# EAGLE board SparkFun_Level_Translator_PCA9306-Panel (EAGLE 9.4.0), part 1 of 4
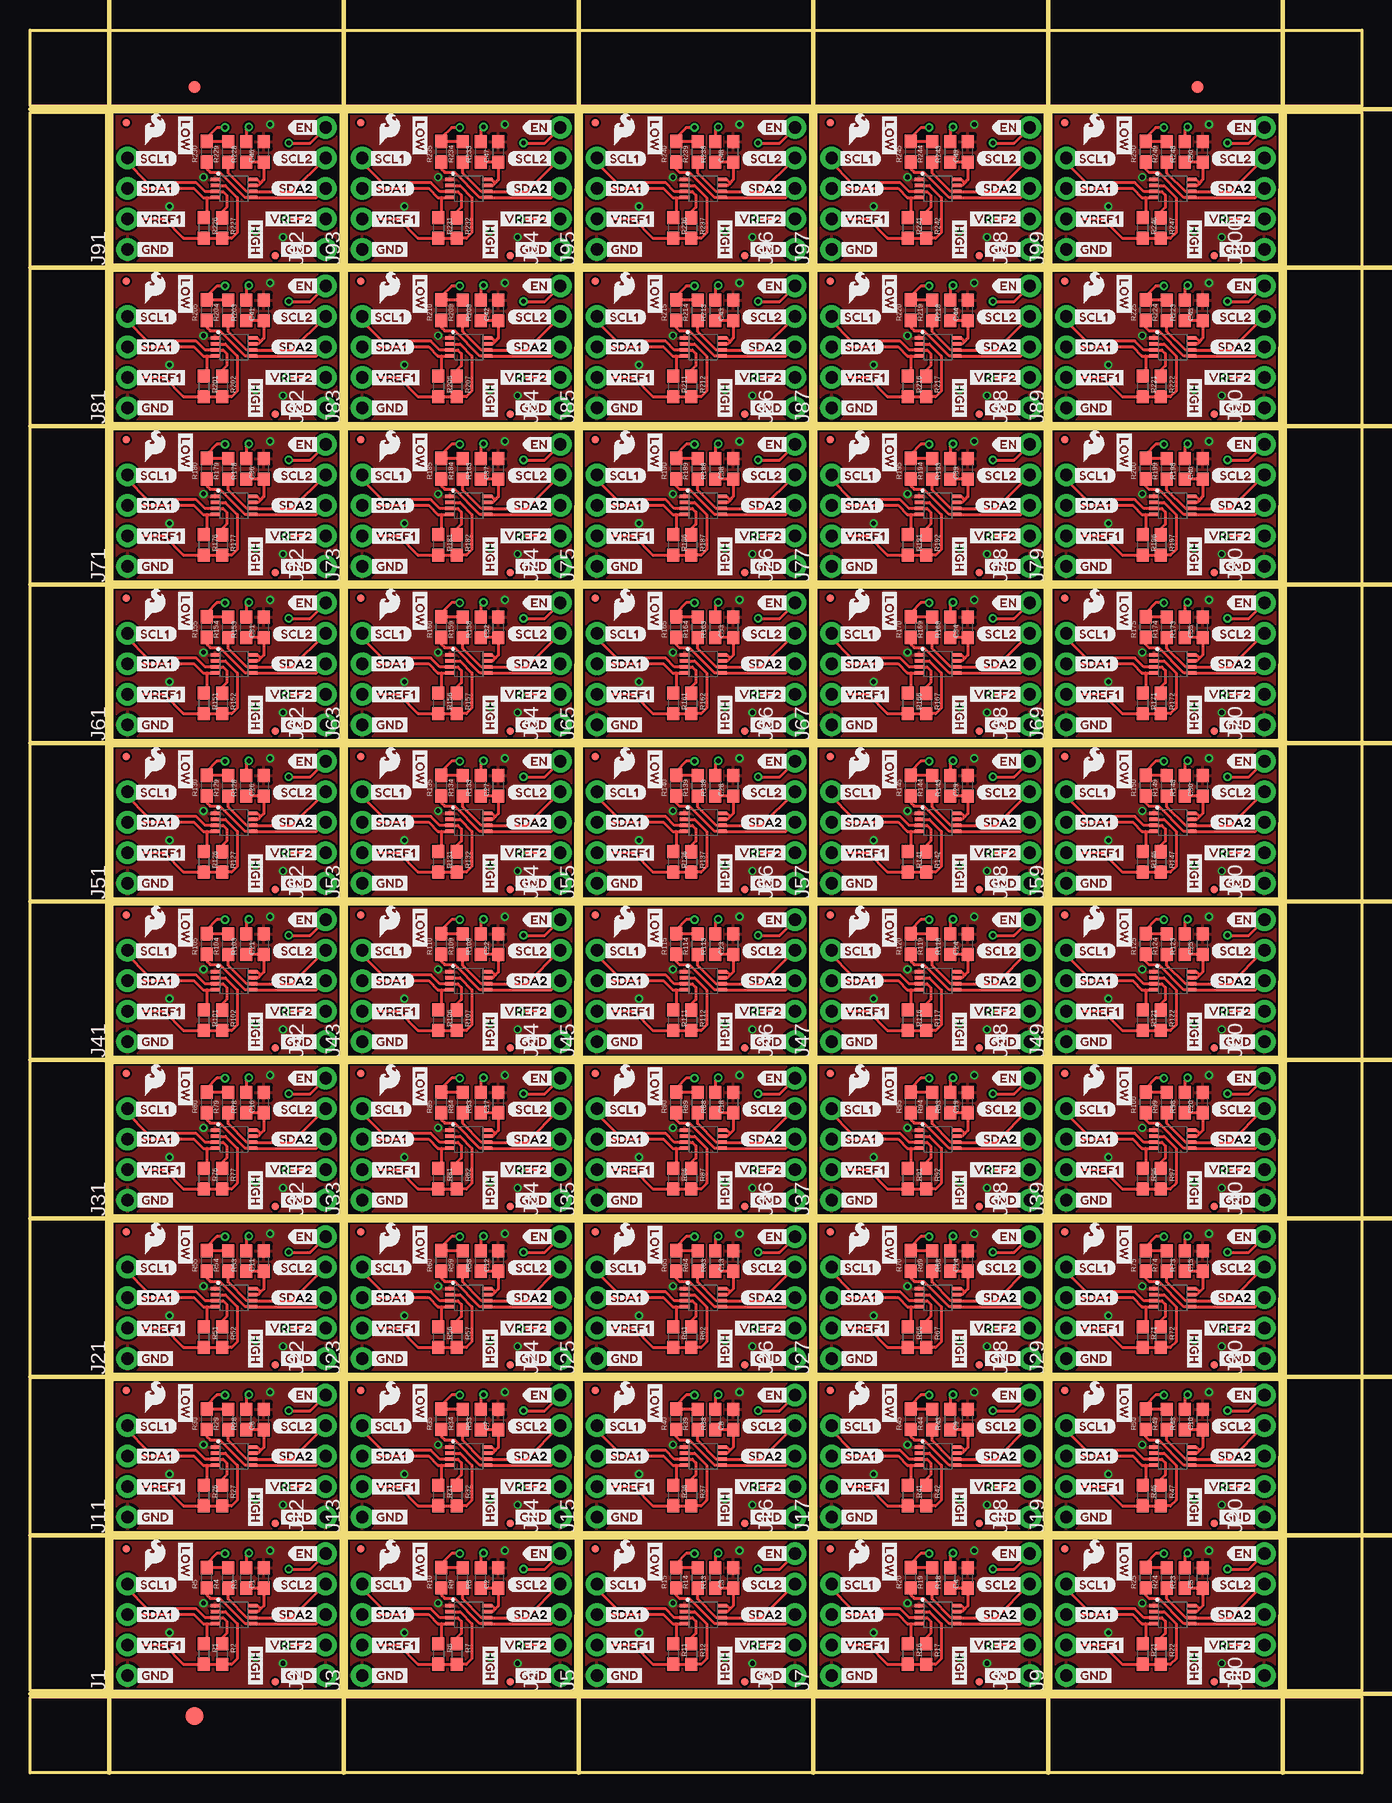
[diagram p0: board, top side]
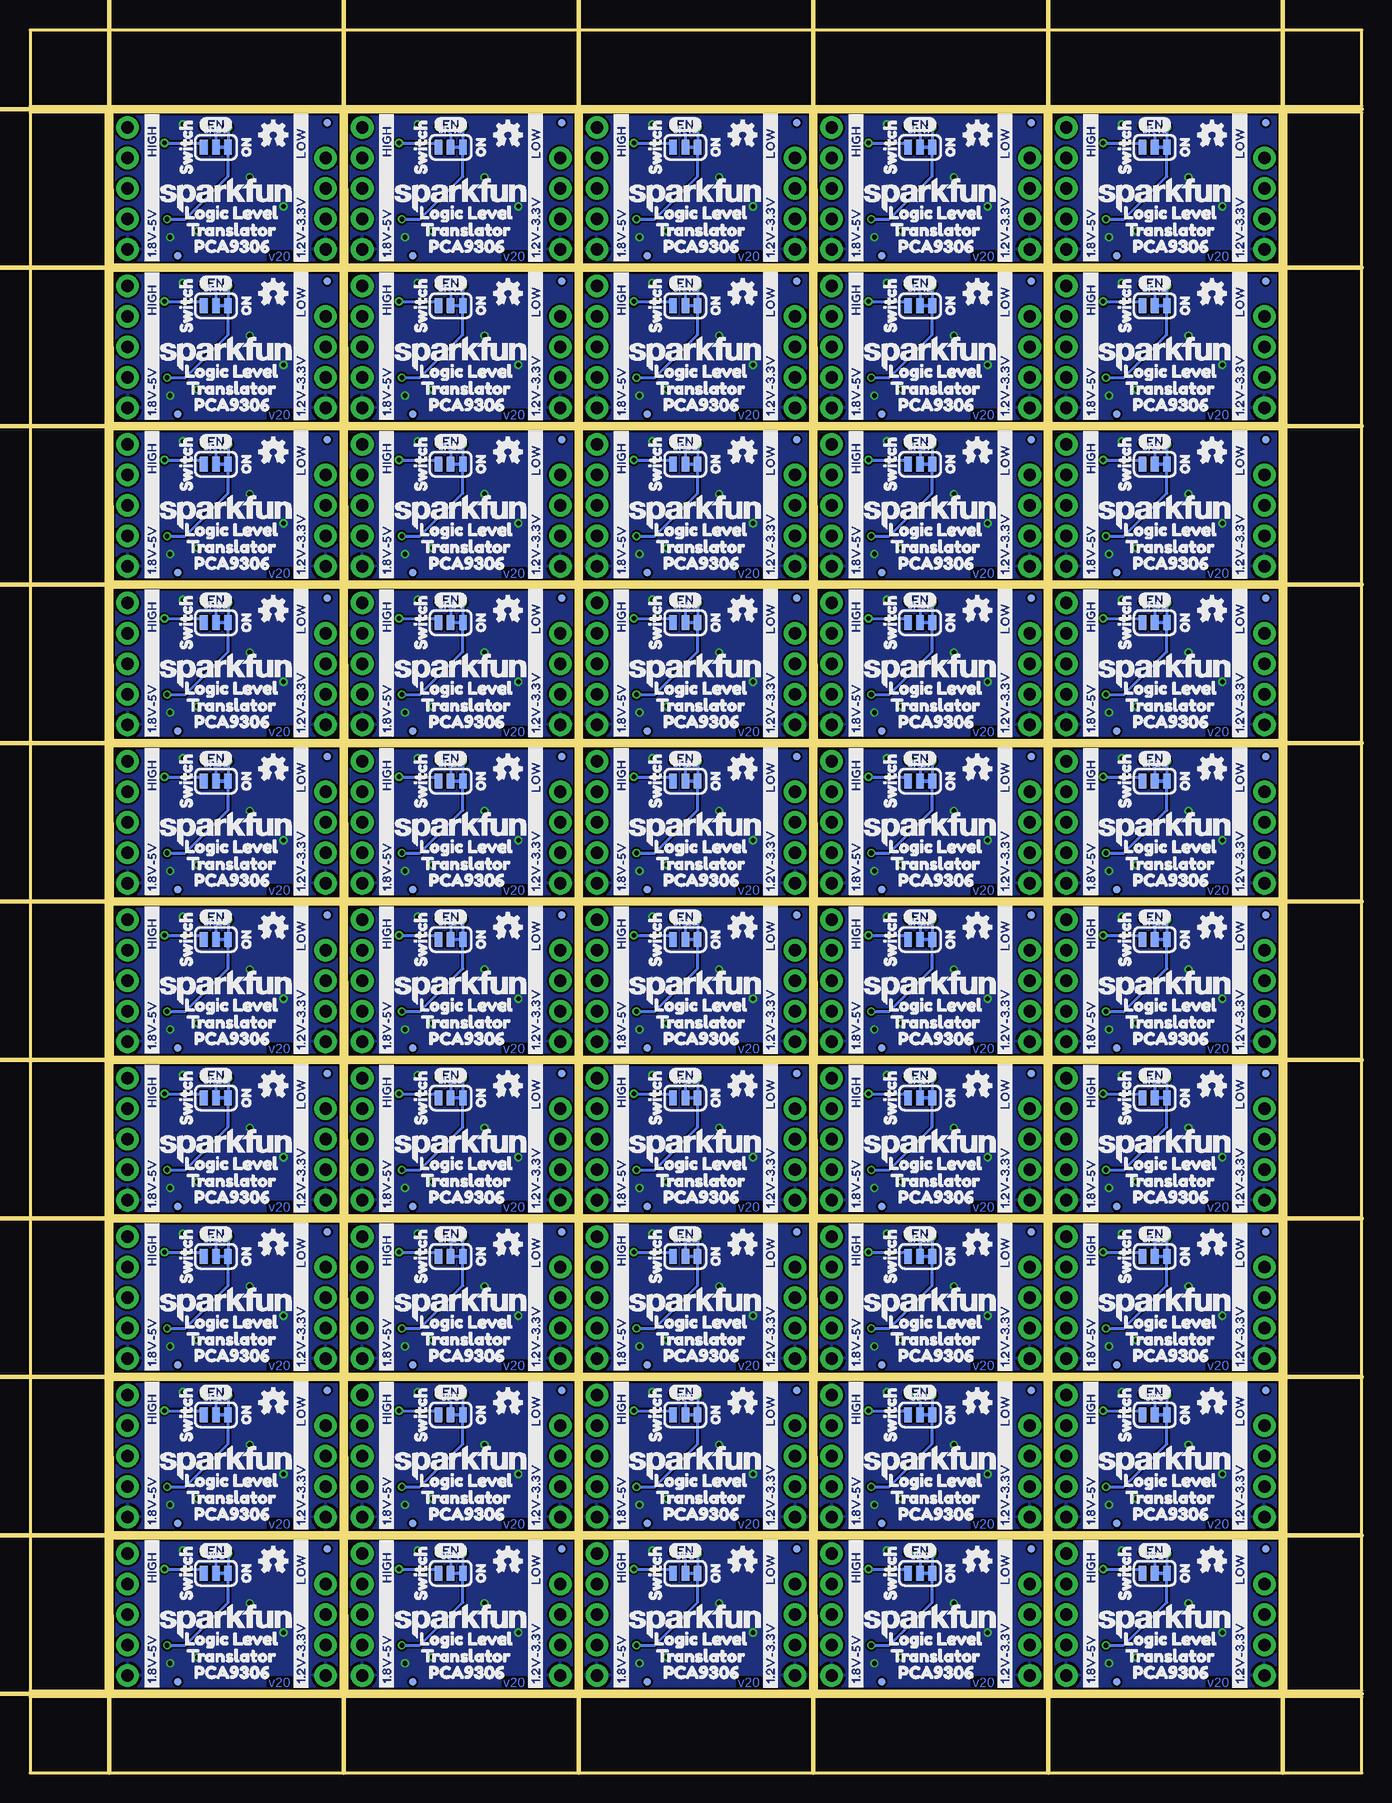
[diagram p1: board, bottom side, seen from below]

Size 111 x 145.29 mm. Coordinates in mm from the lower left corner, seen from the top.
Outline: 216 segments
Copper layers (1*16): Top 0.035mm / dielectric 1.5mm / Bottom 0.035mm
Design rules "SparkFun-2-layer-PCBWay-LIMIT": minimum track width 6mil, minimum drill 0.3mm, track to track 6mil, track to pad 6mil, pad to pad 6mil, via to via 6mil, smd to smd 6mil, copper to edge 6mil, drill to drill 6mil, minimum pad ring 6mil, minimum via ring 6mil, stop-mask expansion 4mil, vias tented up to drill 25mil, thermal gap 10mil
Milling: 17 lines

## Footprints (pad centres in the part's own frame; a part is rotated, then mirrored left to right if it is on the bottom)
0603 = smd 1.1 x 1: 1 -0.85,0; 2 0.85,0
FIDUCIAL-1X2 = smd 1 x 1: 1 0,0
FIDUCIAL-1.5X3 = smd 1.5 x 1.5: 1 0,0
FIDUCIAL-MICRO = smd 0.635 x 0.635: 1 0,0
1X04_NO_SILK = drill 1.016 pad 1.88: 1 0,0; 2 2.54,0; 3 5.08,0; 4 7.62,0
1X05_NO_SILK = drill 1.016 pad 1.88: 1 0,0; 2 2.54,0; 3 5.08,0; 4 7.62,0; 5 10.16,0
SMT-JUMPER_3_1-NC_TRACE_SILK = smd 0.635 x 1.27: 1 -1.016,0; 2 0,0; 3 1.016,0
VSSOP_8PIN = smd 0.8 x 0.3: P1 -1.57,0.734; P2 -1.57,0.234; P3 -1.57,-0.266; P4 -1.57,-0.766; P5 1.53,-0.766; P6 1.53,-0.266; P7 1.53,0.234; P8 1.53,0.734

## Placement (x,y rotation side)
C1  100pF  [0603]  19.48,16.26 90 top
C2  100pF  [0603]  39.04,16.26 90 top
C3  100pF  [0603]  58.6,16.26 90 top
C4  100pF  [0603]  78.16,16.26 90 top
C5  100pF  [0603]  97.71,16.26 90 top
C6  100pF  [0603]  19.48,29.46 90 top
C7  100pF  [0603]  39.04,29.46 90 top
C8  100pF  [0603]  58.6,29.46 90 top
C9  100pF  [0603]  78.16,29.46 90 top
C10  100pF  [0603]  97.71,29.46 90 top
C11  100pF  [0603]  19.48,42.67 90 top
C12  100pF  [0603]  39.04,42.67 90 top
C13  100pF  [0603]  58.6,42.67 90 top
C14  100pF  [0603]  78.16,42.67 90 top
C15  100pF  [0603]  97.71,42.67 90 top
C16  100pF  [0603]  19.48,55.88 90 top
C17  100pF  [0603]  39.04,55.88 90 top
C18  100pF  [0603]  58.6,55.88 90 top
C19  100pF  [0603]  78.16,55.88 90 top
C20  100pF  [0603]  97.71,55.88 90 top
C21  100pF  [0603]  19.48,69.09 90 top
C22  100pF  [0603]  39.04,69.09 90 top
C23  100pF  [0603]  58.6,69.09 90 top
C24  100pF  [0603]  78.16,69.09 90 top
C25  100pF  [0603]  97.71,69.09 90 top
C26  100pF  [0603]  19.48,82.3 90 top
C27  100pF  [0603]  39.04,82.3 90 top
C28  100pF  [0603]  58.6,82.3 90 top
C29  100pF  [0603]  78.16,82.3 90 top
C30  100pF  [0603]  97.71,82.3 90 top
C31  100pF  [0603]  19.48,95.5 90 top
C32  100pF  [0603]  39.04,95.5 90 top
C33  100pF  [0603]  58.6,95.5 90 top
C34  100pF  [0603]  78.16,95.5 90 top
C35  100pF  [0603]  97.71,95.5 90 top
C36  100pF  [0603]  19.48,108.71 90 top
C37  100pF  [0603]  39.04,108.71 90 top
C38  100pF  [0603]  58.6,108.71 90 top
C39  100pF  [0603]  78.16,108.71 90 top
C40  100pF  [0603]  97.71,108.71 90 top
C41  100pF  [0603]  19.48,121.92 90 top
C42  100pF  [0603]  39.04,121.92 90 top
C43  100pF  [0603]  58.6,121.92 90 top
C44  100pF  [0603]  78.16,121.92 90 top
C45  100pF  [0603]  97.71,121.92 90 top
C46  100pF  [0603]  19.48,135.13 90 top
C47  100pF  [0603]  39.04,135.13 90 top
C48  100pF  [0603]  58.6,135.13 90 top
C49  100pF  [0603]  78.16,135.13 90 top
C50  100pF  [0603]  97.71,135.13 90 top
E$1  [FIDUCIAL-1X2]  13.72,140.53 0 top
E$2  [FIDUCIAL-1X2]  97.28,140.53 0 top
E$3  [FIDUCIAL-1.5X3]  13.72,4.76 0 top
FD1  FIDUCIALUFIDUCIAL  [FIDUCIAL-MICRO]  8,18.67 90 bottom
FD2  FIDUCIALUFIDUCIAL  [FIDUCIAL-MICRO]  20.45,7.62 90 top
FD3  FIDUCIALUFIDUCIAL  [FIDUCIAL-MICRO]  8,18.67 90 top
FD4  FIDUCIALUFIDUCIAL  [FIDUCIAL-MICRO]  20.45,7.62 90 bottom
FD5  FIDUCIALUFIDUCIAL  [FIDUCIAL-MICRO]  27.56,18.67 90 top
FD6  FIDUCIALUFIDUCIAL  [FIDUCIAL-MICRO]  27.56,18.67 90 bottom
FD7  FIDUCIALUFIDUCIAL  [FIDUCIAL-MICRO]  40,7.62 90 top
FD8  FIDUCIALUFIDUCIAL  [FIDUCIAL-MICRO]  40,7.62 90 bottom
FD9  FIDUCIALUFIDUCIAL  [FIDUCIAL-MICRO]  47.12,18.67 90 top
FD10  FIDUCIALUFIDUCIAL  [FIDUCIAL-MICRO]  47.12,18.67 90 bottom
FD11  FIDUCIALUFIDUCIAL  [FIDUCIAL-MICRO]  59.56,7.62 90 top
FD12  FIDUCIALUFIDUCIAL  [FIDUCIAL-MICRO]  59.56,7.62 90 bottom
FD13  FIDUCIALUFIDUCIAL  [FIDUCIAL-MICRO]  66.67,18.67 90 top
FD14  FIDUCIALUFIDUCIAL  [FIDUCIAL-MICRO]  66.67,18.67 90 bottom
FD15  FIDUCIALUFIDUCIAL  [FIDUCIAL-MICRO]  79.12,7.62 90 top
FD16  FIDUCIALUFIDUCIAL  [FIDUCIAL-MICRO]  79.12,7.62 90 bottom
FD17  FIDUCIALUFIDUCIAL  [FIDUCIAL-MICRO]  86.23,18.67 90 top
FD18  FIDUCIALUFIDUCIAL  [FIDUCIAL-MICRO]  86.23,18.67 90 bottom
FD19  FIDUCIALUFIDUCIAL  [FIDUCIAL-MICRO]  98.68,7.62 90 top
FD20  FIDUCIALUFIDUCIAL  [FIDUCIAL-MICRO]  98.68,7.62 90 bottom
FD21  FIDUCIALUFIDUCIAL  [FIDUCIAL-MICRO]  8,31.88 90 top
FD22  FIDUCIALUFIDUCIAL  [FIDUCIAL-MICRO]  8,31.88 90 bottom
FD23  FIDUCIALUFIDUCIAL  [FIDUCIAL-MICRO]  20.45,20.83 90 top
FD24  FIDUCIALUFIDUCIAL  [FIDUCIAL-MICRO]  20.45,20.83 90 bottom
FD25  FIDUCIALUFIDUCIAL  [FIDUCIAL-MICRO]  27.56,31.88 90 top
FD26  FIDUCIALUFIDUCIAL  [FIDUCIAL-MICRO]  27.56,31.88 90 bottom
FD27  FIDUCIALUFIDUCIAL  [FIDUCIAL-MICRO]  40,20.83 90 top
FD28  FIDUCIALUFIDUCIAL  [FIDUCIAL-MICRO]  40,20.83 90 bottom
FD29  FIDUCIALUFIDUCIAL  [FIDUCIAL-MICRO]  47.12,31.88 90 top
FD30  FIDUCIALUFIDUCIAL  [FIDUCIAL-MICRO]  47.12,31.88 90 bottom
FD31  FIDUCIALUFIDUCIAL  [FIDUCIAL-MICRO]  59.56,20.83 90 top
FD32  FIDUCIALUFIDUCIAL  [FIDUCIAL-MICRO]  59.56,20.83 90 bottom
FD33  FIDUCIALUFIDUCIAL  [FIDUCIAL-MICRO]  66.67,31.88 90 top
FD34  FIDUCIALUFIDUCIAL  [FIDUCIAL-MICRO]  66.67,31.88 90 bottom
FD35  FIDUCIALUFIDUCIAL  [FIDUCIAL-MICRO]  79.12,20.83 90 top
FD36  FIDUCIALUFIDUCIAL  [FIDUCIAL-MICRO]  79.12,20.83 90 bottom
FD37  FIDUCIALUFIDUCIAL  [FIDUCIAL-MICRO]  86.23,31.88 90 top
FD38  FIDUCIALUFIDUCIAL  [FIDUCIAL-MICRO]  86.23,31.88 90 bottom
FD39  FIDUCIALUFIDUCIAL  [FIDUCIAL-MICRO]  98.68,20.83 90 top
FD40  FIDUCIALUFIDUCIAL  [FIDUCIAL-MICRO]  98.68,20.83 90 bottom
FD41  FIDUCIALUFIDUCIAL  [FIDUCIAL-MICRO]  8,45.08 90 top
FD42  FIDUCIALUFIDUCIAL  [FIDUCIAL-MICRO]  8,45.08 90 bottom
FD43  FIDUCIALUFIDUCIAL  [FIDUCIAL-MICRO]  20.45,34.04 90 top
FD44  FIDUCIALUFIDUCIAL  [FIDUCIAL-MICRO]  20.45,34.04 90 bottom
FD45  FIDUCIALUFIDUCIAL  [FIDUCIAL-MICRO]  27.56,45.08 90 top
FD46  FIDUCIALUFIDUCIAL  [FIDUCIAL-MICRO]  27.56,45.08 90 bottom
FD47  FIDUCIALUFIDUCIAL  [FIDUCIAL-MICRO]  40,34.04 90 top
FD48  FIDUCIALUFIDUCIAL  [FIDUCIAL-MICRO]  40,34.04 90 bottom
FD49  FIDUCIALUFIDUCIAL  [FIDUCIAL-MICRO]  47.12,45.08 90 top
FD50  FIDUCIALUFIDUCIAL  [FIDUCIAL-MICRO]  47.12,45.08 90 bottom
FD51  FIDUCIALUFIDUCIAL  [FIDUCIAL-MICRO]  59.56,34.04 90 top
FD52  FIDUCIALUFIDUCIAL  [FIDUCIAL-MICRO]  59.56,34.04 90 bottom
FD53  FIDUCIALUFIDUCIAL  [FIDUCIAL-MICRO]  66.67,45.08 90 top
FD54  FIDUCIALUFIDUCIAL  [FIDUCIAL-MICRO]  66.67,45.08 90 bottom
FD55  FIDUCIALUFIDUCIAL  [FIDUCIAL-MICRO]  79.12,34.04 90 top
FD56  FIDUCIALUFIDUCIAL  [FIDUCIAL-MICRO]  79.12,34.04 90 bottom
FD57  FIDUCIALUFIDUCIAL  [FIDUCIAL-MICRO]  86.23,45.08 90 top
FD58  FIDUCIALUFIDUCIAL  [FIDUCIAL-MICRO]  86.23,45.08 90 bottom
FD59  FIDUCIALUFIDUCIAL  [FIDUCIAL-MICRO]  98.68,34.04 90 top
FD60  FIDUCIALUFIDUCIAL  [FIDUCIAL-MICRO]  98.68,34.04 90 bottom
FD61  FIDUCIALUFIDUCIAL  [FIDUCIAL-MICRO]  8,58.29 90 top
FD62  FIDUCIALUFIDUCIAL  [FIDUCIAL-MICRO]  8,58.29 90 bottom
FD63  FIDUCIALUFIDUCIAL  [FIDUCIAL-MICRO]  20.45,47.24 90 top
FD64  FIDUCIALUFIDUCIAL  [FIDUCIAL-MICRO]  20.45,47.24 90 bottom
FD65  FIDUCIALUFIDUCIAL  [FIDUCIAL-MICRO]  27.56,58.29 90 top
FD66  FIDUCIALUFIDUCIAL  [FIDUCIAL-MICRO]  27.56,58.29 90 bottom
FD67  FIDUCIALUFIDUCIAL  [FIDUCIAL-MICRO]  40,47.24 90 top
FD68  FIDUCIALUFIDUCIAL  [FIDUCIAL-MICRO]  40,47.24 90 bottom
FD69  FIDUCIALUFIDUCIAL  [FIDUCIAL-MICRO]  47.12,58.29 90 top
FD70  FIDUCIALUFIDUCIAL  [FIDUCIAL-MICRO]  47.12,58.29 90 bottom
FD71  FIDUCIALUFIDUCIAL  [FIDUCIAL-MICRO]  59.56,47.24 90 top
FD72  FIDUCIALUFIDUCIAL  [FIDUCIAL-MICRO]  59.56,47.24 90 bottom
FD73  FIDUCIALUFIDUCIAL  [FIDUCIAL-MICRO]  66.67,58.29 90 top
FD74  FIDUCIALUFIDUCIAL  [FIDUCIAL-MICRO]  66.67,58.29 90 bottom
FD75  FIDUCIALUFIDUCIAL  [FIDUCIAL-MICRO]  79.12,47.24 90 top
FD76  FIDUCIALUFIDUCIAL  [FIDUCIAL-MICRO]  79.12,47.24 90 bottom
FD77  FIDUCIALUFIDUCIAL  [FIDUCIAL-MICRO]  86.23,58.29 90 top
FD78  FIDUCIALUFIDUCIAL  [FIDUCIAL-MICRO]  86.23,58.29 90 bottom
FD79  FIDUCIALUFIDUCIAL  [FIDUCIAL-MICRO]  98.68,47.24 90 top
FD80  FIDUCIALUFIDUCIAL  [FIDUCIAL-MICRO]  98.68,47.24 90 bottom
FD81  FIDUCIALUFIDUCIAL  [FIDUCIAL-MICRO]  8,71.5 90 top
FD82  FIDUCIALUFIDUCIAL  [FIDUCIAL-MICRO]  8,71.5 90 bottom
FD83  FIDUCIALUFIDUCIAL  [FIDUCIAL-MICRO]  20.45,60.45 90 top
FD84  FIDUCIALUFIDUCIAL  [FIDUCIAL-MICRO]  20.45,60.45 90 bottom
FD85  FIDUCIALUFIDUCIAL  [FIDUCIAL-MICRO]  27.56,71.5 90 top
FD86  FIDUCIALUFIDUCIAL  [FIDUCIAL-MICRO]  27.56,71.5 90 bottom
FD87  FIDUCIALUFIDUCIAL  [FIDUCIAL-MICRO]  40,60.45 90 top
FD88  FIDUCIALUFIDUCIAL  [FIDUCIAL-MICRO]  40,60.45 90 bottom
FD89  FIDUCIALUFIDUCIAL  [FIDUCIAL-MICRO]  47.12,71.5 90 top
FD90  FIDUCIALUFIDUCIAL  [FIDUCIAL-MICRO]  47.12,71.5 90 bottom
FD91  FIDUCIALUFIDUCIAL  [FIDUCIAL-MICRO]  59.56,60.45 90 top
FD92  FIDUCIALUFIDUCIAL  [FIDUCIAL-MICRO]  59.56,60.45 90 bottom
FD93  FIDUCIALUFIDUCIAL  [FIDUCIAL-MICRO]  66.67,71.5 90 top
FD94  FIDUCIALUFIDUCIAL  [FIDUCIAL-MICRO]  66.67,71.5 90 bottom
FD95  FIDUCIALUFIDUCIAL  [FIDUCIAL-MICRO]  79.12,60.45 90 top
FD96  FIDUCIALUFIDUCIAL  [FIDUCIAL-MICRO]  79.12,60.45 90 bottom
FD97  FIDUCIALUFIDUCIAL  [FIDUCIAL-MICRO]  86.23,71.5 90 top
FD98  FIDUCIALUFIDUCIAL  [FIDUCIAL-MICRO]  86.23,71.5 90 bottom
FD99  FIDUCIALUFIDUCIAL  [FIDUCIAL-MICRO]  98.68,60.45 90 top
FD100  FIDUCIALUFIDUCIAL  [FIDUCIAL-MICRO]  98.68,60.45 90 bottom
FD101  FIDUCIALUFIDUCIAL  [FIDUCIAL-MICRO]  8,84.71 90 top
FD102  FIDUCIALUFIDUCIAL  [FIDUCIAL-MICRO]  8,84.71 90 bottom
FD103  FIDUCIALUFIDUCIAL  [FIDUCIAL-MICRO]  20.45,73.66 90 top
FD104  FIDUCIALUFIDUCIAL  [FIDUCIAL-MICRO]  20.45,73.66 90 bottom
FD105  FIDUCIALUFIDUCIAL  [FIDUCIAL-MICRO]  27.56,84.71 90 top
FD106  FIDUCIALUFIDUCIAL  [FIDUCIAL-MICRO]  27.56,84.71 90 bottom
FD107  FIDUCIALUFIDUCIAL  [FIDUCIAL-MICRO]  40,73.66 90 top
FD108  FIDUCIALUFIDUCIAL  [FIDUCIAL-MICRO]  40,73.66 90 bottom
FD109  FIDUCIALUFIDUCIAL  [FIDUCIAL-MICRO]  47.12,84.71 90 top
FD110  FIDUCIALUFIDUCIAL  [FIDUCIAL-MICRO]  47.12,84.71 90 bottom
FD111  FIDUCIALUFIDUCIAL  [FIDUCIAL-MICRO]  59.56,73.66 90 top
FD112  FIDUCIALUFIDUCIAL  [FIDUCIAL-MICRO]  59.56,73.66 90 bottom
FD113  FIDUCIALUFIDUCIAL  [FIDUCIAL-MICRO]  66.67,84.71 90 top
FD114  FIDUCIALUFIDUCIAL  [FIDUCIAL-MICRO]  66.67,84.71 90 bottom
FD115  FIDUCIALUFIDUCIAL  [FIDUCIAL-MICRO]  79.12,73.66 90 top
FD116  FIDUCIALUFIDUCIAL  [FIDUCIAL-MICRO]  79.12,73.66 90 bottom
FD117  FIDUCIALUFIDUCIAL  [FIDUCIAL-MICRO]  86.23,84.71 90 top
FD118  FIDUCIALUFIDUCIAL  [FIDUCIAL-MICRO]  86.23,84.71 90 bottom
FD119  FIDUCIALUFIDUCIAL  [FIDUCIAL-MICRO]  98.68,73.66 90 top
FD120  FIDUCIALUFIDUCIAL  [FIDUCIAL-MICRO]  98.68,73.66 90 bottom
FD121  FIDUCIALUFIDUCIAL  [FIDUCIAL-MICRO]  8,97.92 90 top
FD122  FIDUCIALUFIDUCIAL  [FIDUCIAL-MICRO]  8,97.92 90 bottom
FD123  FIDUCIALUFIDUCIAL  [FIDUCIAL-MICRO]  20.45,86.87 90 top
FD124  FIDUCIALUFIDUCIAL  [FIDUCIAL-MICRO]  20.45,86.87 90 bottom
FD125  FIDUCIALUFIDUCIAL  [FIDUCIAL-MICRO]  27.56,97.92 90 top
FD126  FIDUCIALUFIDUCIAL  [FIDUCIAL-MICRO]  27.56,97.92 90 bottom
FD127  FIDUCIALUFIDUCIAL  [FIDUCIAL-MICRO]  40,86.87 90 top
FD128  FIDUCIALUFIDUCIAL  [FIDUCIAL-MICRO]  40,86.87 90 bottom
FD129  FIDUCIALUFIDUCIAL  [FIDUCIAL-MICRO]  47.12,97.92 90 top
FD130  FIDUCIALUFIDUCIAL  [FIDUCIAL-MICRO]  47.12,97.92 90 bottom
FD131  FIDUCIALUFIDUCIAL  [FIDUCIAL-MICRO]  59.56,86.87 90 top
FD132  FIDUCIALUFIDUCIAL  [FIDUCIAL-MICRO]  59.56,86.87 90 bottom
FD133  FIDUCIALUFIDUCIAL  [FIDUCIAL-MICRO]  66.67,97.92 90 top
FD134  FIDUCIALUFIDUCIAL  [FIDUCIAL-MICRO]  66.67,97.92 90 bottom
FD135  FIDUCIALUFIDUCIAL  [FIDUCIAL-MICRO]  79.12,86.87 90 top
FD136  FIDUCIALUFIDUCIAL  [FIDUCIAL-MICRO]  79.12,86.87 90 bottom
FD137  FIDUCIALUFIDUCIAL  [FIDUCIAL-MICRO]  86.23,97.92 90 top
FD138  FIDUCIALUFIDUCIAL  [FIDUCIAL-MICRO]  86.23,97.92 90 bottom
FD139  FIDUCIALUFIDUCIAL  [FIDUCIAL-MICRO]  98.68,86.87 90 top
FD140  FIDUCIALUFIDUCIAL  [FIDUCIAL-MICRO]  98.68,86.87 90 bottom
FD141  FIDUCIALUFIDUCIAL  [FIDUCIAL-MICRO]  8,111.12 90 top
FD142  FIDUCIALUFIDUCIAL  [FIDUCIAL-MICRO]  8,111.12 90 bottom
FD143  FIDUCIALUFIDUCIAL  [FIDUCIAL-MICRO]  20.45,100.08 90 top
FD144  FIDUCIALUFIDUCIAL  [FIDUCIAL-MICRO]  20.45,100.08 90 bottom
FD145  FIDUCIALUFIDUCIAL  [FIDUCIAL-MICRO]  27.56,111.12 90 top
FD146  FIDUCIALUFIDUCIAL  [FIDUCIAL-MICRO]  27.56,111.12 90 bottom
FD147  FIDUCIALUFIDUCIAL  [FIDUCIAL-MICRO]  40,100.08 90 top
FD148  FIDUCIALUFIDUCIAL  [FIDUCIAL-MICRO]  40,100.08 90 bottom
FD149  FIDUCIALUFIDUCIAL  [FIDUCIAL-MICRO]  47.12,111.12 90 top
FD150  FIDUCIALUFIDUCIAL  [FIDUCIAL-MICRO]  47.12,111.12 90 bottom
FD151  FIDUCIALUFIDUCIAL  [FIDUCIAL-MICRO]  59.56,100.08 90 top
FD152  FIDUCIALUFIDUCIAL  [FIDUCIAL-MICRO]  59.56,100.08 90 bottom
FD153  FIDUCIALUFIDUCIAL  [FIDUCIAL-MICRO]  66.67,111.12 90 top
FD154  FIDUCIALUFIDUCIAL  [FIDUCIAL-MICRO]  66.67,111.12 90 bottom
FD155  FIDUCIALUFIDUCIAL  [FIDUCIAL-MICRO]  79.12,100.08 90 top
FD156  FIDUCIALUFIDUCIAL  [FIDUCIAL-MICRO]  79.12,100.08 90 bottom
FD157  FIDUCIALUFIDUCIAL  [FIDUCIAL-MICRO]  86.23,111.12 90 top
FD158  FIDUCIALUFIDUCIAL  [FIDUCIAL-MICRO]  86.23,111.12 90 bottom
FD159  FIDUCIALUFIDUCIAL  [FIDUCIAL-MICRO]  98.68,100.08 90 top
FD160  FIDUCIALUFIDUCIAL  [FIDUCIAL-MICRO]  98.68,100.08 90 bottom
FD161  FIDUCIALUFIDUCIAL  [FIDUCIAL-MICRO]  8,124.33 90 top
FD162  FIDUCIALUFIDUCIAL  [FIDUCIAL-MICRO]  8,124.33 90 bottom
FD163  FIDUCIALUFIDUCIAL  [FIDUCIAL-MICRO]  20.45,113.28 90 top
FD164  FIDUCIALUFIDUCIAL  [FIDUCIAL-MICRO]  20.45,113.28 90 bottom
FD165  FIDUCIALUFIDUCIAL  [FIDUCIAL-MICRO]  27.56,124.33 90 top
FD166  FIDUCIALUFIDUCIAL  [FIDUCIAL-MICRO]  27.56,124.33 90 bottom
FD167  FIDUCIALUFIDUCIAL  [FIDUCIAL-MICRO]  40,113.28 90 top
FD168  FIDUCIALUFIDUCIAL  [FIDUCIAL-MICRO]  40,113.28 90 bottom
FD169  FIDUCIALUFIDUCIAL  [FIDUCIAL-MICRO]  47.12,124.33 90 top
FD170  FIDUCIALUFIDUCIAL  [FIDUCIAL-MICRO]  47.12,124.33 90 bottom
FD171  FIDUCIALUFIDUCIAL  [FIDUCIAL-MICRO]  59.56,113.28 90 top
FD172  FIDUCIALUFIDUCIAL  [FIDUCIAL-MICRO]  59.56,113.28 90 bottom
FD173  FIDUCIALUFIDUCIAL  [FIDUCIAL-MICRO]  66.67,124.33 90 top
FD174  FIDUCIALUFIDUCIAL  [FIDUCIAL-MICRO]  66.67,124.33 90 bottom
FD175  FIDUCIALUFIDUCIAL  [FIDUCIAL-MICRO]  79.12,113.28 90 top
FD176  FIDUCIALUFIDUCIAL  [FIDUCIAL-MICRO]  79.12,113.28 90 bottom
FD177  FIDUCIALUFIDUCIAL  [FIDUCIAL-MICRO]  86.23,124.33 90 top
FD178  FIDUCIALUFIDUCIAL  [FIDUCIAL-MICRO]  86.23,124.33 90 bottom
FD179  FIDUCIALUFIDUCIAL  [FIDUCIAL-MICRO]  98.68,113.28 90 top
FD180  FIDUCIALUFIDUCIAL  [FIDUCIAL-MICRO]  98.68,113.28 90 bottom
FD181  FIDUCIALUFIDUCIAL  [FIDUCIAL-MICRO]  8,137.54 90 top
FD182  FIDUCIALUFIDUCIAL  [FIDUCIAL-MICRO]  8,137.54 90 bottom
FD183  FIDUCIALUFIDUCIAL  [FIDUCIAL-MICRO]  20.45,126.49 90 top
FD184  FIDUCIALUFIDUCIAL  [FIDUCIAL-MICRO]  20.45,126.49 90 bottom
FD185  FIDUCIALUFIDUCIAL  [FIDUCIAL-MICRO]  27.56,137.54 90 top
FD186  FIDUCIALUFIDUCIAL  [FIDUCIAL-MICRO]  27.56,137.54 90 bottom
FD187  FIDUCIALUFIDUCIAL  [FIDUCIAL-MICRO]  40,126.49 90 top
FD188  FIDUCIALUFIDUCIAL  [FIDUCIAL-MICRO]  40,126.49 90 bottom
FD189  FIDUCIALUFIDUCIAL  [FIDUCIAL-MICRO]  47.12,137.54 90 top
FD190  FIDUCIALUFIDUCIAL  [FIDUCIAL-MICRO]  47.12,137.54 90 bottom
FD191  FIDUCIALUFIDUCIAL  [FIDUCIAL-MICRO]  59.56,126.49 90 top
FD192  FIDUCIALUFIDUCIAL  [FIDUCIAL-MICRO]  59.56,126.49 90 bottom
FD193  FIDUCIALUFIDUCIAL  [FIDUCIAL-MICRO]  66.67,137.54 90 top
FD194  FIDUCIALUFIDUCIAL  [FIDUCIAL-MICRO]  66.67,137.54 90 bottom
FD195  FIDUCIALUFIDUCIAL  [FIDUCIAL-MICRO]  79.12,126.49 90 top
FD196  FIDUCIALUFIDUCIAL  [FIDUCIAL-MICRO]  79.12,126.49 90 bottom
FD197  FIDUCIALUFIDUCIAL  [FIDUCIAL-MICRO]  86.23,137.54 90 top
FD198  FIDUCIALUFIDUCIAL  [FIDUCIAL-MICRO]  86.23,137.54 90 bottom
FD199  FIDUCIALUFIDUCIAL  [FIDUCIAL-MICRO]  98.68,126.49 90 top
FD200  FIDUCIALUFIDUCIAL  [FIDUCIAL-MICRO]  98.68,126.49 90 bottom
J1  [1X04_NO_SILK]  8.13,8.13 90 top
J2  [1X05_NO_SILK]  24.64,8.13 90 top
J3  [1X04_NO_SILK]  27.69,8.13 90 top
J4  [1X05_NO_SILK]  44.2,8.13 90 top
J5  [1X04_NO_SILK]  47.24,8.13 90 top
J6  [1X05_NO_SILK]  63.75,8.13 90 top
J7  [1X04_NO_SILK]  66.8,8.13 90 top
J8  [1X05_NO_SILK]  83.31,8.13 90 top
J9  [1X04_NO_SILK]  86.36,8.13 90 top
J10  [1X05_NO_SILK]  102.87,8.13 90 top
J11  [1X04_NO_SILK]  8.13,21.34 90 top
J12  [1X05_NO_SILK]  24.64,21.34 90 top
J13  [1X04_NO_SILK]  27.69,21.34 90 top
J14  [1X05_NO_SILK]  44.2,21.34 90 top
J15  [1X04_NO_SILK]  47.24,21.34 90 top
J16  [1X05_NO_SILK]  63.75,21.34 90 top
J17  [1X04_NO_SILK]  66.8,21.34 90 top
J18  [1X05_NO_SILK]  83.31,21.34 90 top
J19  [1X04_NO_SILK]  86.36,21.34 90 top
J20  [1X05_NO_SILK]  102.87,21.34 90 top
J21  [1X04_NO_SILK]  8.13,34.54 90 top
J22  [1X05_NO_SILK]  24.64,34.54 90 top
J23  [1X04_NO_SILK]  27.69,34.54 90 top
J24  [1X05_NO_SILK]  44.2,34.54 90 top
J25  [1X04_NO_SILK]  47.24,34.54 90 top
J26  [1X05_NO_SILK]  63.75,34.54 90 top
J27  [1X04_NO_SILK]  66.8,34.54 90 top
J28  [1X05_NO_SILK]  83.31,34.54 90 top
J29  [1X04_NO_SILK]  86.36,34.54 90 top
J30  [1X05_NO_SILK]  102.87,34.54 90 top
J31  [1X04_NO_SILK]  8.13,47.75 90 top
J32  [1X05_NO_SILK]  24.64,47.75 90 top
J33  [1X04_NO_SILK]  27.69,47.75 90 top
J34  [1X05_NO_SILK]  44.2,47.75 90 top
J35  [1X04_NO_SILK]  47.24,47.75 90 top
J36  [1X05_NO_SILK]  63.75,47.75 90 top
J37  [1X04_NO_SILK]  66.8,47.75 90 top
J38  [1X05_NO_SILK]  83.31,47.75 90 top
J39  [1X04_NO_SILK]  86.36,47.75 90 top
J40  [1X05_NO_SILK]  102.87,47.75 90 top
J41  [1X04_NO_SILK]  8.13,60.96 90 top
J42  [1X05_NO_SILK]  24.64,60.96 90 top
J43  [1X04_NO_SILK]  27.69,60.96 90 top
J44  [1X05_NO_SILK]  44.2,60.96 90 top
J45  [1X04_NO_SILK]  47.24,60.96 90 top
J46  [1X05_NO_SILK]  63.75,60.96 90 top
J47  [1X04_NO_SILK]  66.8,60.96 90 top
J48  [1X05_NO_SILK]  83.31,60.96 90 top
J49  [1X04_NO_SILK]  86.36,60.96 90 top
J50  [1X05_NO_SILK]  102.87,60.96 90 top
J51  [1X04_NO_SILK]  8.13,74.17 90 top
J52  [1X05_NO_SILK]  24.64,74.17 90 top
J53  [1X04_NO_SILK]  27.69,74.17 90 top
J54  [1X05_NO_SILK]  44.2,74.17 90 top
J55  [1X04_NO_SILK]  47.24,74.17 90 top
J56  [1X05_NO_SILK]  63.75,74.17 90 top
J57  [1X04_NO_SILK]  66.8,74.17 90 top
J58  [1X05_NO_SILK]  83.31,74.17 90 top
J59  [1X04_NO_SILK]  86.36,74.17 90 top
J60  [1X05_NO_SILK]  102.87,74.17 90 top
J61  [1X04_NO_SILK]  8.13,87.38 90 top
J62  [1X05_NO_SILK]  24.64,87.38 90 top
J63  [1X04_NO_SILK]  27.69,87.38 90 top
J64  [1X05_NO_SILK]  44.2,87.38 90 top
J65  [1X04_NO_SILK]  47.24,87.38 90 top
J66  [1X05_NO_SILK]  63.75,87.38 90 top
J67  [1X04_NO_SILK]  66.8,87.38 90 top
J68  [1X05_NO_SILK]  83.31,87.38 90 top
J69  [1X04_NO_SILK]  86.36,87.38 90 top
J70  [1X05_NO_SILK]  102.87,87.38 90 top
J71  [1X04_NO_SILK]  8.13,100.58 90 top
J72  [1X05_NO_SILK]  24.64,100.58 90 top
J73  [1X04_NO_SILK]  27.69,100.58 90 top
J74  [1X05_NO_SILK]  44.2,100.58 90 top
J75  [1X04_NO_SILK]  47.24,100.58 90 top
J76  [1X05_NO_SILK]  63.75,100.58 90 top
J77  [1X04_NO_SILK]  66.8,100.58 90 top
J78  [1X05_NO_SILK]  83.31,100.58 90 top
J79  [1X04_NO_SILK]  86.36,100.58 90 top
J80  [1X05_NO_SILK]  102.87,100.58 90 top
J81  [1X04_NO_SILK]  8.13,113.79 90 top
J82  [1X05_NO_SILK]  24.64,113.79 90 top
J83  [1X04_NO_SILK]  27.69,113.79 90 top
J84  [1X05_NO_SILK]  44.2,113.79 90 top
J85  [1X04_NO_SILK]  47.24,113.79 90 top
J86  [1X05_NO_SILK]  63.75,113.79 90 top
J87  [1X04_NO_SILK]  66.8,113.79 90 top
J88  [1X05_NO_SILK]  83.31,113.79 90 top
J89  [1X04_NO_SILK]  86.36,113.79 90 top
J90  [1X05_NO_SILK]  102.87,113.79 90 top
J91  [1X04_NO_SILK]  8.13,127 90 top
J92  [1X05_NO_SILK]  24.64,127 90 top
J93  [1X04_NO_SILK]  27.69,127 90 top
J94  [1X05_NO_SILK]  44.2,127 90 top
J95  [1X04_NO_SILK]  47.24,127 90 top
J96  [1X05_NO_SILK]  63.75,127 90 top
J97  [1X04_NO_SILK]  66.8,127 90 top
J98  [1X05_NO_SILK]  83.31,127 90 top
J99  [1X04_NO_SILK]  86.36,127 90 top
J100  [1X05_NO_SILK]  102.87,127 90 top
JP1  EN  [SMT-JUMPER_3_1-NC_TRACE_SILK]  17.27,16.64 0 bottom
JP2  EN  [SMT-JUMPER_3_1-NC_TRACE_SILK]  36.83,16.64 0 bottom
JP3  EN  [SMT-JUMPER_3_1-NC_TRACE_SILK]  56.39,16.64 0 bottom
JP4  EN  [SMT-JUMPER_3_1-NC_TRACE_SILK]  75.95,16.64 0 bottom
JP5  EN  [SMT-JUMPER_3_1-NC_TRACE_SILK]  95.5,16.64 0 bottom
JP6  EN  [SMT-JUMPER_3_1-NC_TRACE_SILK]  17.27,29.84 0 bottom
JP7  EN  [SMT-JUMPER_3_1-NC_TRACE_SILK]  36.83,29.84 0 bottom
JP8  EN  [SMT-JUMPER_3_1-NC_TRACE_SILK]  56.39,29.84 0 bottom
JP9  EN  [SMT-JUMPER_3_1-NC_TRACE_SILK]  75.95,29.84 0 bottom
JP10  EN  [SMT-JUMPER_3_1-NC_TRACE_SILK]  95.5,29.84 0 bottom
JP11  EN  [SMT-JUMPER_3_1-NC_TRACE_SILK]  17.27,43.05 0 bottom
JP12  EN  [SMT-JUMPER_3_1-NC_TRACE_SILK]  36.83,43.05 0 bottom
JP13  EN  [SMT-JUMPER_3_1-NC_TRACE_SILK]  56.39,43.05 0 bottom
JP14  EN  [SMT-JUMPER_3_1-NC_TRACE_SILK]  75.95,43.05 0 bottom
JP15  EN  [SMT-JUMPER_3_1-NC_TRACE_SILK]  95.5,43.05 0 bottom
JP16  EN  [SMT-JUMPER_3_1-NC_TRACE_SILK]  17.27,56.26 0 bottom
JP17  EN  [SMT-JUMPER_3_1-NC_TRACE_SILK]  36.83,56.26 0 bottom
JP18  EN  [SMT-JUMPER_3_1-NC_TRACE_SILK]  56.39,56.26 0 bottom
JP19  EN  [SMT-JUMPER_3_1-NC_TRACE_SILK]  75.95,56.26 0 bottom
JP20  EN  [SMT-JUMPER_3_1-NC_TRACE_SILK]  95.5,56.26 0 bottom
JP21  EN  [SMT-JUMPER_3_1-NC_TRACE_SILK]  17.27,69.47 0 bottom
JP22  EN  [SMT-JUMPER_3_1-NC_TRACE_SILK]  36.83,69.47 0 bottom
JP23  EN  [SMT-JUMPER_3_1-NC_TRACE_SILK]  56.39,69.47 0 bottom
JP24  EN  [SMT-JUMPER_3_1-NC_TRACE_SILK]  75.95,69.47 0 bottom
JP25  EN  [SMT-JUMPER_3_1-NC_TRACE_SILK]  95.5,69.47 0 bottom
JP26  EN  [SMT-JUMPER_3_1-NC_TRACE_SILK]  17.27,82.68 0 bottom
JP27  EN  [SMT-JUMPER_3_1-NC_TRACE_SILK]  36.83,82.68 0 bottom
JP28  EN  [SMT-JUMPER_3_1-NC_TRACE_SILK]  56.39,82.68 0 bottom
JP29  EN  [SMT-JUMPER_3_1-NC_TRACE_SILK]  75.95,82.68 0 bottom
JP30  EN  [SMT-JUMPER_3_1-NC_TRACE_SILK]  95.5,82.68 0 bottom
JP31  EN  [SMT-JUMPER_3_1-NC_TRACE_SILK]  17.27,95.89 0 bottom
JP32  EN  [SMT-JUMPER_3_1-NC_TRACE_SILK]  36.83,95.89 0 bottom
JP33  EN  [SMT-JUMPER_3_1-NC_TRACE_SILK]  56.39,95.89 0 bottom
JP34  EN  [SMT-JUMPER_3_1-NC_TRACE_SILK]  75.95,95.89 0 bottom
JP35  EN  [SMT-JUMPER_3_1-NC_TRACE_SILK]  95.5,95.89 0 bottom
JP36  EN  [SMT-JUMPER_3_1-NC_TRACE_SILK]  17.27,109.09 0 bottom
JP37  EN  [SMT-JUMPER_3_1-NC_TRACE_SILK]  36.83,109.09 0 bottom
JP38  EN  [SMT-JUMPER_3_1-NC_TRACE_SILK]  56.39,109.09 0 bottom
JP39  EN  [SMT-JUMPER_3_1-NC_TRACE_SILK]  75.95,109.09 0 bottom
JP40  EN  [SMT-JUMPER_3_1-NC_TRACE_SILK]  95.5,109.09 0 bottom
JP41  EN  [SMT-JUMPER_3_1-NC_TRACE_SILK]  17.27,122.3 0 bottom
JP42  EN  [SMT-JUMPER_3_1-NC_TRACE_SILK]  36.83,122.3 0 bottom
JP43  EN  [SMT-JUMPER_3_1-NC_TRACE_SILK]  56.39,122.3 0 bottom
JP44  EN  [SMT-JUMPER_3_1-NC_TRACE_SILK]  75.95,122.3 0 bottom
JP45  EN  [SMT-JUMPER_3_1-NC_TRACE_SILK]  95.5,122.3 0 bottom
JP46  EN  [SMT-JUMPER_3_1-NC_TRACE_SILK]  17.27,135.51 0 bottom
JP47  EN  [SMT-JUMPER_3_1-NC_TRACE_SILK]  36.83,135.51 0 bottom
JP48  EN  [SMT-JUMPER_3_1-NC_TRACE_SILK]  56.39,135.51 0 bottom
JP49  EN  [SMT-JUMPER_3_1-NC_TRACE_SILK]  75.95,135.51 0 bottom
JP50  EN  [SMT-JUMPER_3_1-NC_TRACE_SILK]  95.5,135.51 0 bottom
LOGO1  OSHW-LOGOMINI  [OSHW-LOGO-MINI]  12.5,17.68 0 bottom
LOGO2  SFE_LOGO_NAME.1_INCH  [SFE_LOGO_NAME_.1]  16.43,12.65 0 bottom
LOGO3  SFE_LOGO_FLAME.1_INCH  [SFE_LOGO_FLAME_.1]  10.41,18.16 0 top
LOGO4  SFE_LOGO_FLAME.1_INCH  [SFE_LOGO_FLAME_.1]  29.97,18.16 0 top
LOGO5  SFE_LOGO_NAME.1_INCH  [SFE_LOGO_NAME_.1]  35.99,12.65 0 bottom
LOGO6  OSHW-LOGOMINI  [OSHW-LOGO-MINI]  32.05,17.68 0 bottom
LOGO7  SFE_LOGO_FLAME.1_INCH  [SFE_LOGO_FLAME_.1]  49.53,18.16 0 top
LOGO8  SFE_LOGO_NAME.1_INCH  [SFE_LOGO_NAME_.1]  55.55,12.65 0 bottom
LOGO9  OSHW-LOGOMINI  [OSHW-LOGO-MINI]  51.61,17.68 0 bottom
LOGO10  SFE_LOGO_FLAME.1_INCH  [SFE_LOGO_FLAME_.1]  69.09,18.16 0 top
LOGO11  SFE_LOGO_NAME.1_INCH  [SFE_LOGO_NAME_.1]  75.11,12.65 0 bottom
LOGO12  OSHW-LOGOMINI  [OSHW-LOGO-MINI]  71.17,17.68 0 bottom
LOGO13  SFE_LOGO_FLAME.1_INCH  [SFE_LOGO_FLAME_.1]  88.65,18.16 0 top
LOGO14  SFE_LOGO_NAME.1_INCH  [SFE_LOGO_NAME_.1]  94.67,12.65 0 bottom
LOGO15  OSHW-LOGOMINI  [OSHW-LOGO-MINI]  90.73,17.68 0 bottom
LOGO16  SFE_LOGO_FLAME.1_INCH  [SFE_LOGO_FLAME_.1]  10.41,31.37 0 top
LOGO17  SFE_LOGO_NAME.1_INCH  [SFE_LOGO_NAME_.1]  16.43,25.86 0 bottom
LOGO18  OSHW-LOGOMINI  [OSHW-LOGO-MINI]  12.5,30.89 0 bottom
LOGO19  SFE_LOGO_FLAME.1_INCH  [SFE_LOGO_FLAME_.1]  29.97,31.37 0 top
LOGO20  SFE_LOGO_NAME.1_INCH  [SFE_LOGO_NAME_.1]  35.99,25.86 0 bottom
LOGO21  OSHW-LOGOMINI  [OSHW-LOGO-MINI]  32.05,30.89 0 bottom
LOGO22  SFE_LOGO_FLAME.1_INCH  [SFE_LOGO_FLAME_.1]  49.53,31.37 0 top
LOGO23  SFE_LOGO_NAME.1_INCH  [SFE_LOGO_NAME_.1]  55.55,25.86 0 bottom
LOGO24  OSHW-LOGOMINI  [OSHW-LOGO-MINI]  51.61,30.89 0 bottom
LOGO25  SFE_LOGO_FLAME.1_INCH  [SFE_LOGO_FLAME_.1]  69.09,31.37 0 top
LOGO26  SFE_LOGO_NAME.1_INCH  [SFE_LOGO_NAME_.1]  75.11,25.86 0 bottom
LOGO27  OSHW-LOGOMINI  [OSHW-LOGO-MINI]  71.17,30.89 0 bottom
LOGO28  SFE_LOGO_FLAME.1_INCH  [SFE_LOGO_FLAME_.1]  88.65,31.37 0 top
LOGO29  SFE_LOGO_NAME.1_INCH  [SFE_LOGO_NAME_.1]  94.67,25.86 0 bottom
LOGO30  OSHW-LOGOMINI  [OSHW-LOGO-MINI]  90.73,30.89 0 bottom
LOGO31  SFE_LOGO_FLAME.1_INCH  [SFE_LOGO_FLAME_.1]  10.41,44.58 0 top
LOGO32  SFE_LOGO_NAME.1_INCH  [SFE_LOGO_NAME_.1]  16.43,39.07 0 bottom
LOGO33  OSHW-LOGOMINI  [OSHW-LOGO-MINI]  12.5,44.09 0 bottom
LOGO34  SFE_LOGO_FLAME.1_INCH  [SFE_LOGO_FLAME_.1]  29.97,44.58 0 top
LOGO35  SFE_LOGO_NAME.1_INCH  [SFE_LOGO_NAME_.1]  35.99,39.07 0 bottom
LOGO36  OSHW-LOGOMINI  [OSHW-LOGO-MINI]  32.05,44.09 0 bottom
LOGO37  SFE_LOGO_FLAME.1_INCH  [SFE_LOGO_FLAME_.1]  49.53,44.58 0 top
LOGO38  SFE_LOGO_NAME.1_INCH  [SFE_LOGO_NAME_.1]  55.55,39.07 0 bottom
LOGO39  OSHW-LOGOMINI  [OSHW-LOGO-MINI]  51.61,44.09 0 bottom
LOGO40  SFE_LOGO_FLAME.1_INCH  [SFE_LOGO_FLAME_.1]  69.09,44.58 0 top
LOGO41  SFE_LOGO_NAME.1_INCH  [SFE_LOGO_NAME_.1]  75.11,39.07 0 bottom
LOGO42  OSHW-LOGOMINI  [OSHW-LOGO-MINI]  71.17,44.09 0 bottom
LOGO43  SFE_LOGO_FLAME.1_INCH  [SFE_LOGO_FLAME_.1]  88.65,44.58 0 top
LOGO44  SFE_LOGO_NAME.1_INCH  [SFE_LOGO_NAME_.1]  94.67,39.07 0 bottom
LOGO45  OSHW-LOGOMINI  [OSHW-LOGO-MINI]  90.73,44.09 0 bottom
LOGO46  SFE_LOGO_FLAME.1_INCH  [SFE_LOGO_FLAME_.1]  10.41,57.78 0 top
LOGO47  SFE_LOGO_NAME.1_INCH  [SFE_LOGO_NAME_.1]  16.43,52.27 0 bottom
LOGO48  OSHW-LOGOMINI  [OSHW-LOGO-MINI]  12.5,57.3 0 bottom
LOGO49  SFE_LOGO_FLAME.1_INCH  [SFE_LOGO_FLAME_.1]  29.97,57.78 0 top
LOGO50  SFE_LOGO_NAME.1_INCH  [SFE_LOGO_NAME_.1]  35.99,52.27 0 bottom
LOGO51  OSHW-LOGOMINI  [OSHW-LOGO-MINI]  32.05,57.3 0 bottom
LOGO52  SFE_LOGO_FLAME.1_INCH  [SFE_LOGO_FLAME_.1]  49.53,57.78 0 top
LOGO53  SFE_LOGO_NAME.1_INCH  [SFE_LOGO_NAME_.1]  55.55,52.27 0 bottom
LOGO54  OSHW-LOGOMINI  [OSHW-LOGO-MINI]  51.61,57.3 0 bottom
LOGO55  SFE_LOGO_FLAME.1_INCH  [SFE_LOGO_FLAME_.1]  69.09,57.78 0 top
LOGO56  SFE_LOGO_NAME.1_INCH  [SFE_LOGO_NAME_.1]  75.11,52.27 0 bottom
LOGO57  OSHW-LOGOMINI  [OSHW-LOGO-MINI]  71.17,57.3 0 bottom
LOGO58  SFE_LOGO_FLAME.1_INCH  [SFE_LOGO_FLAME_.1]  88.65,57.78 0 top
LOGO59  SFE_LOGO_NAME.1_INCH  [SFE_LOGO_NAME_.1]  94.67,52.27 0 bottom
LOGO60  OSHW-LOGOMINI  [OSHW-LOGO-MINI]  90.73,57.3 0 bottom
LOGO61  SFE_LOGO_FLAME.1_INCH  [SFE_LOGO_FLAME_.1]  10.41,70.99 0 top
LOGO62  SFE_LOGO_NAME.1_INCH  [SFE_LOGO_NAME_.1]  16.43,65.48 0 bottom
LOGO63  OSHW-LOGOMINI  [OSHW-LOGO-MINI]  12.5,70.51 0 bottom
LOGO64  SFE_LOGO_FLAME.1_INCH  [SFE_LOGO_FLAME_.1]  29.97,70.99 0 top
LOGO65  SFE_LOGO_NAME.1_INCH  [SFE_LOGO_NAME_.1]  35.99,65.48 0 bottom
LOGO66  OSHW-LOGOMINI  [OSHW-LOGO-MINI]  32.05,70.51 0 bottom
LOGO67  SFE_LOGO_FLAME.1_INCH  [SFE_LOGO_FLAME_.1]  49.53,70.99 0 top
LOGO68  SFE_LOGO_NAME.1_INCH  [SFE_LOGO_NAME_.1]  55.55,65.48 0 bottom
LOGO69  OSHW-LOGOMINI  [OSHW-LOGO-MINI]  51.61,70.51 0 bottom
LOGO70  SFE_LOGO_FLAME.1_INCH  [SFE_LOGO_FLAME_.1]  69.09,70.99 0 top
LOGO71  SFE_LOGO_NAME.1_INCH  [SFE_LOGO_NAME_.1]  75.11,65.48 0 bottom
LOGO72  OSHW-LOGOMINI  [OSHW-LOGO-MINI]  71.17,70.51 0 bottom
LOGO73  SFE_LOGO_FLAME.1_INCH  [SFE_LOGO_FLAME_.1]  88.65,70.99 0 top
LOGO74  SFE_LOGO_NAME.1_INCH  [SFE_LOGO_NAME_.1]  94.67,65.48 0 bottom
LOGO75  OSHW-LOGOMINI  [OSHW-LOGO-MINI]  90.73,70.51 0 bottom
LOGO76  SFE_LOGO_FLAME.1_INCH  [SFE_LOGO_FLAME_.1]  10.41,84.2 0 top
LOGO77  SFE_LOGO_NAME.1_INCH  [SFE_LOGO_NAME_.1]  16.43,78.69 0 bottom
LOGO78  OSHW-LOGOMINI  [OSHW-LOGO-MINI]  12.5,83.72 0 bottom
LOGO79  SFE_LOGO_FLAME.1_INCH  [SFE_LOGO_FLAME_.1]  29.97,84.2 0 top
LOGO80  SFE_LOGO_NAME.1_INCH  [SFE_LOGO_NAME_.1]  35.99,78.69 0 bottom
LOGO81  OSHW-LOGOMINI  [OSHW-LOGO-MINI]  32.05,83.72 0 bottom
LOGO82  SFE_LOGO_FLAME.1_INCH  [SFE_LOGO_FLAME_.1]  49.53,84.2 0 top
LOGO83  SFE_LOGO_NAME.1_INCH  [SFE_LOGO_NAME_.1]  55.55,78.69 0 bottom
LOGO84  OSHW-LOGOMINI  [OSHW-LOGO-MINI]  51.61,83.72 0 bottom
LOGO85  SFE_LOGO_FLAME.1_INCH  [SFE_LOGO_FLAME_.1]  69.09,84.2 0 top
LOGO86  SFE_LOGO_NAME.1_INCH  [SFE_LOGO_NAME_.1]  75.11,78.69 0 bottom
LOGO87  OSHW-LOGOMINI  [OSHW-LOGO-MINI]  71.17,83.72 0 bottom
LOGO88  SFE_LOGO_FLAME.1_INCH  [SFE_LOGO_FLAME_.1]  88.65,84.2 0 top
LOGO89  SFE_LOGO_NAME.1_INCH  [SFE_LOGO_NAME_.1]  94.67,78.69 0 bottom
LOGO90  OSHW-LOGOMINI  [OSHW-LOGO-MINI]  90.73,83.72 0 bottom
LOGO91  SFE_LOGO_FLAME.1_INCH  [SFE_LOGO_FLAME_.1]  10.41,97.41 0 top
LOGO92  SFE_LOGO_NAME.1_INCH  [SFE_LOGO_NAME_.1]  16.43,91.9 0 bottom
LOGO93  OSHW-LOGOMINI  [OSHW-LOGO-MINI]  12.5,96.93 0 bottom
LOGO94  SFE_LOGO_FLAME.1_INCH  [SFE_LOGO_FLAME_.1]  29.97,97.41 0 top
LOGO95  SFE_LOGO_NAME.1_INCH  [SFE_LOGO_NAME_.1]  35.99,91.9 0 bottom
LOGO96  OSHW-LOGOMINI  [OSHW-LOGO-MINI]  32.05,96.93 0 bottom
LOGO97  SFE_LOGO_FLAME.1_INCH  [SFE_LOGO_FLAME_.1]  49.53,97.41 0 top
LOGO98  SFE_LOGO_NAME.1_INCH  [SFE_LOGO_NAME_.1]  55.55,91.9 0 bottom
LOGO99  OSHW-LOGOMINI  [OSHW-LOGO-MINI]  51.61,96.93 0 bottom
LOGO100  SFE_LOGO_FLAME.1_INCH  [SFE_LOGO_FLAME_.1]  69.09,97.41 0 top
LOGO101  SFE_LOGO_NAME.1_INCH  [SFE_LOGO_NAME_.1]  75.11,91.9 0 bottom
LOGO102  OSHW-LOGOMINI  [OSHW-LOGO-MINI]  71.17,96.93 0 bottom
LOGO103  SFE_LOGO_FLAME.1_INCH  [SFE_LOGO_FLAME_.1]  88.65,97.41 0 top
LOGO104  SFE_LOGO_NAME.1_INCH  [SFE_LOGO_NAME_.1]  94.67,91.9 0 bottom
LOGO105  OSHW-LOGOMINI  [OSHW-LOGO-MINI]  90.73,96.93 0 bottom
LOGO106  SFE_LOGO_FLAME.1_INCH  [SFE_LOGO_FLAME_.1]  10.41,110.62 0 top
LOGO107  SFE_LOGO_NAME.1_INCH  [SFE_LOGO_NAME_.1]  16.43,105.11 0 bottom
LOGO108  OSHW-LOGOMINI  [OSHW-LOGO-MINI]  12.5,110.13 0 bottom
LOGO109  SFE_LOGO_FLAME.1_INCH  [SFE_LOGO_FLAME_.1]  29.97,110.62 0 top
LOGO110  SFE_LOGO_NAME.1_INCH  [SFE_LOGO_NAME_.1]  35.99,105.11 0 bottom
LOGO111  OSHW-LOGOMINI  [OSHW-LOGO-MINI]  32.05,110.13 0 bottom
LOGO112  SFE_LOGO_FLAME.1_INCH  [SFE_LOGO_FLAME_.1]  49.53,110.62 0 top
LOGO113  SFE_LOGO_NAME.1_INCH  [SFE_LOGO_NAME_.1]  55.55,105.11 0 bottom
LOGO114  OSHW-LOGOMINI  [OSHW-LOGO-MINI]  51.61,110.13 0 bottom
LOGO115  SFE_LOGO_FLAME.1_INCH  [SFE_LOGO_FLAME_.1]  69.09,110.62 0 top
LOGO116  SFE_LOGO_NAME.1_INCH  [SFE_LOGO_NAME_.1]  75.11,105.11 0 bottom
LOGO117  OSHW-LOGOMINI  [OSHW-LOGO-MINI]  71.17,110.13 0 bottom
LOGO118  SFE_LOGO_FLAME.1_INCH  [SFE_LOGO_FLAME_.1]  88.65,110.62 0 top
LOGO119  SFE_LOGO_NAME.1_INCH  [SFE_LOGO_NAME_.1]  94.67,105.11 0 bottom
LOGO120  OSHW-LOGOMINI  [OSHW-LOGO-MINI]  90.73,110.13 0 bottom
LOGO121  SFE_LOGO_FLAME.1_INCH  [SFE_LOGO_FLAME_.1]  10.41,123.83 0 top
LOGO122  SFE_LOGO_NAME.1_INCH  [SFE_LOGO_NAME_.1]  16.43,118.31 0 bottom
LOGO123  OSHW-LOGOMINI  [OSHW-LOGO-MINI]  12.5,123.34 0 bottom
LOGO124  SFE_LOGO_FLAME.1_INCH  [SFE_LOGO_FLAME_.1]  29.97,123.83 0 top
LOGO125  SFE_LOGO_NAME.1_INCH  [SFE_LOGO_NAME_.1]  35.99,118.31 0 bottom
LOGO126  OSHW-LOGOMINI  [OSHW-LOGO-MINI]  32.05,123.34 0 bottom
LOGO127  SFE_LOGO_FLAME.1_INCH  [SFE_LOGO_FLAME_.1]  49.53,123.83 0 top
LOGO128  SFE_LOGO_NAME.1_INCH  [SFE_LOGO_NAME_.1]  55.55,118.31 0 bottom
LOGO129  OSHW-LOGOMINI  [OSHW-LOGO-MINI]  51.61,123.34 0 bottom
LOGO130  SFE_LOGO_FLAME.1_INCH  [SFE_LOGO_FLAME_.1]  69.09,123.83 0 top
LOGO131  SFE_LOGO_NAME.1_INCH  [SFE_LOGO_NAME_.1]  75.11,118.31 0 bottom
LOGO132  OSHW-LOGOMINI  [OSHW-LOGO-MINI]  71.17,123.34 0 bottom
LOGO133  SFE_LOGO_FLAME.1_INCH  [SFE_LOGO_FLAME_.1]  88.65,123.83 0 top
LOGO134  SFE_LOGO_NAME.1_INCH  [SFE_LOGO_NAME_.1]  94.67,118.31 0 bottom
LOGO135  OSHW-LOGOMINI  [OSHW-LOGO-MINI]  90.73,123.34 0 bottom
LOGO136  SFE_LOGO_FLAME.1_INCH  [SFE_LOGO_FLAME_.1]  10.41,137.03 0 top
LOGO137  SFE_LOGO_NAME.1_INCH  [SFE_LOGO_NAME_.1]  16.43,131.52 0 bottom
LOGO138  OSHW-LOGOMINI  [OSHW-LOGO-MINI]  12.5,136.55 0 bottom
LOGO139  SFE_LOGO_FLAME.1_INCH  [SFE_LOGO_FLAME_.1]  29.97,137.03 0 top
LOGO140  SFE_LOGO_NAME.1_INCH  [SFE_LOGO_NAME_.1]  35.99,131.52 0 bottom
LOGO141  OSHW-LOGOMINI  [OSHW-LOGO-MINI]  32.05,136.55 0 bottom
LOGO142  SFE_LOGO_FLAME.1_INCH  [SFE_LOGO_FLAME_.1]  49.53,137.03 0 top
LOGO143  SFE_LOGO_NAME.1_INCH  [SFE_LOGO_NAME_.1]  55.55,131.52 0 bottom
LOGO144  OSHW-LOGOMINI  [OSHW-LOGO-MINI]  51.61,136.55 0 bottom
LOGO145  SFE_LOGO_FLAME.1_INCH  [SFE_LOGO_FLAME_.1]  69.09,137.03 0 top
LOGO146  SFE_LOGO_NAME.1_INCH  [SFE_LOGO_NAME_.1]  75.11,131.52 0 bottom
LOGO147  OSHW-LOGOMINI  [OSHW-LOGO-MINI]  71.17,136.55 0 bottom
LOGO148  SFE_LOGO_FLAME.1_INCH  [SFE_LOGO_FLAME_.1]  88.65,137.03 0 top
LOGO149  SFE_LOGO_NAME.1_INCH  [SFE_LOGO_NAME_.1]  94.67,131.52 0 bottom
LOGO150  OSHW-LOGOMINI  [OSHW-LOGO-MINI]  90.73,136.55 0 bottom
R1  2.2k  [0603]  14.48,9.92 270 top
R2  2.2k  [0603]  16,9.91 270 top
R3  200k  [0603]  18.01,16.26 90 top
R4  2.2k  [0603]  16.51,16.26 90 top
R5  2.2k  [0603]  14.73,16.27 90 top
R6  2.2k  [0603]  34.04,9.92 270 top
R7  2.2k  [0603]  35.56,9.91 270 top
R8  200k  [0603]  37.57,16.26 90 top
R9  2.2k  [0603]  36.07,16.26 90 top
R10  2.2k  [0603]  34.29,16.27 90 top
R11  2.2k  [0603]  53.59,9.92 270 top
R12  2.2k  [0603]  55.12,9.91 270 top
R13  200k  [0603]  57.12,16.26 90 top
R14  2.2k  [0603]  55.63,16.26 90 top
R15  2.2k  [0603]  53.85,16.27 90 top
R16  2.2k  [0603]  73.15,9.92 270 top
R17  2.2k  [0603]  74.68,9.91 270 top
R18  200k  [0603]  76.68,16.26 90 top
R19  2.2k  [0603]  75.18,16.26 90 top
R20  2.2k  [0603]  73.41,16.27 90 top
R21  2.2k  [0603]  92.71,9.92 270 top
R22  2.2k  [0603]  94.23,9.91 270 top
R23  200k  [0603]  96.24,16.26 90 top
R24  2.2k  [0603]  94.74,16.26 90 top
R25  2.2k  [0603]  92.96,16.27 90 top
R26  2.2k  [0603]  14.48,23.13 270 top
R27  2.2k  [0603]  16,23.11 270 top
R28  200k  [0603]  18.01,29.46 90 top
R29  2.2k  [0603]  16.51,29.46 90 top
R30  2.2k  [0603]  14.73,29.48 90 top
R31  2.2k  [0603]  34.04,23.13 270 top
R32  2.2k  [0603]  35.56,23.11 270 top
R33  200k  [0603]  37.57,29.46 90 top
R34  2.2k  [0603]  36.07,29.46 90 top
R35  2.2k  [0603]  34.29,29.48 90 top
R36  2.2k  [0603]  53.59,23.13 270 top
R37  2.2k  [0603]  55.12,23.11 270 top
R38  200k  [0603]  57.12,29.46 90 top
R39  2.2k  [0603]  55.63,29.46 90 top
R40  2.2k  [0603]  53.85,29.48 90 top
R41  2.2k  [0603]  73.15,23.13 270 top
R42  2.2k  [0603]  74.68,23.11 270 top
R43  200k  [0603]  76.68,29.46 90 top
R44  2.2k  [0603]  75.18,29.46 90 top
R45  2.2k  [0603]  73.41,29.48 90 top
R46  2.2k  [0603]  92.71,23.13 270 top
R47  2.2k  [0603]  94.23,23.11 270 top
R48  200k  [0603]  96.24,29.46 90 top
R49  2.2k  [0603]  94.74,29.46 90 top
R50  2.2k  [0603]  92.96,29.48 90 top
R51  2.2k  [0603]  14.48,36.34 270 top
R52  2.2k  [0603]  16,36.32 270 top
R53  200k  [0603]  18.01,42.67 90 top
R54  2.2k  [0603]  16.51,42.67 90 top
R55  2.2k  [0603]  14.73,42.69 90 top
R56  2.2k  [0603]  34.04,36.34 270 top
R57  2.2k  [0603]  35.56,36.32 270 top
R58  200k  [0603]  37.57,42.67 90 top
R59  2.2k  [0603]  36.07,42.67 90 top
R60  2.2k  [0603]  34.29,42.69 90 top
R61  2.2k  [0603]  53.59,36.34 270 top
R62  2.2k  [0603]  55.12,36.32 270 top
R63  200k  [0603]  57.12,42.67 90 top
R64  2.2k  [0603]  55.63,42.67 90 top
R65  2.2k  [0603]  53.85,42.69 90 top
R66  2.2k  [0603]  73.15,36.34 270 top
R67  2.2k  [0603]  74.68,36.32 270 top
R68  200k  [0603]  76.68,42.67 90 top
R69  2.2k  [0603]  75.18,42.67 90 top
R70  2.2k  [0603]  73.41,42.69 90 top
R71  2.2k  [0603]  92.71,36.34 270 top
R72  2.2k  [0603]  94.23,36.32 270 top
R73  200k  [0603]  96.24,42.67 90 top
R74  2.2k  [0603]  94.74,42.67 90 top
R75  2.2k  [0603]  92.96,42.69 90 top
R76  2.2k  [0603]  14.48,49.55 270 top
R77  2.2k  [0603]  16,49.53 270 top
R78  200k  [0603]  18.01,55.88 90 top
R79  2.2k  [0603]  16.51,55.88 90 top
R80  2.2k  [0603]  14.73,55.9 90 top
R81  2.2k  [0603]  34.04,49.55 270 top
R82  2.2k  [0603]  35.56,49.53 270 top
R83  200k  [0603]  37.57,55.88 90 top
R84  2.2k  [0603]  36.07,55.88 90 top
R85  2.2k  [0603]  34.29,55.9 90 top
R86  2.2k  [0603]  53.59,49.55 270 top
R87  2.2k  [0603]  55.12,49.53 270 top
R88  200k  [0603]  57.12,55.88 90 top
R89  2.2k  [0603]  55.63,55.88 90 top
R90  2.2k  [0603]  53.85,55.9 90 top
R91  2.2k  [0603]  73.15,49.55 270 top
R92  2.2k  [0603]  74.68,49.53 270 top
R93  200k  [0603]  76.68,55.88 90 top
R94  2.2k  [0603]  75.18,55.88 90 top
R95  2.2k  [0603]  73.41,55.9 90 top
R96  2.2k  [0603]  92.71,49.55 270 top
R97  2.2k  [0603]  94.23,49.53 270 top
R98  200k  [0603]  96.24,55.88 90 top
R99  2.2k  [0603]  94.74,55.88 90 top
R100  2.2k  [0603]  92.96,55.9 90 top
R101  2.2k  [0603]  14.48,62.75 270 top
R102  2.2k  [0603]  16,62.74 270 top
R103  200k  [0603]  18.01,69.09 90 top
R104  2.2k  [0603]  16.51,69.09 90 top
R105  2.2k  [0603]  14.73,69.1 90 top
R106  2.2k  [0603]  34.04,62.75 270 top
R107  2.2k  [0603]  35.56,62.74 270 top
R108  200k  [0603]  37.57,69.09 90 top
R109  2.2k  [0603]  36.07,69.09 90 top
R110  2.2k  [0603]  34.29,69.1 90 top
R111  2.2k  [0603]  53.59,62.75 270 top
R112  2.2k  [0603]  55.12,62.74 270 top
R113  200k  [0603]  57.12,69.09 90 top
R114  2.2k  [0603]  55.63,69.09 90 top
R115  2.2k  [0603]  53.85,69.1 90 top
R116  2.2k  [0603]  73.15,62.75 270 top
R117  2.2k  [0603]  74.68,62.74 270 top
R118  200k  [0603]  76.68,69.09 90 top
R119  2.2k  [0603]  75.18,69.09 90 top
R120  2.2k  [0603]  73.41,69.1 90 top
R121  2.2k  [0603]  92.71,62.75 270 top
R122  2.2k  [0603]  94.23,62.74 270 top
R123  200k  [0603]  96.24,69.09 90 top
R124  2.2k  [0603]  94.74,69.09 90 top
R125  2.2k  [0603]  92.96,69.1 90 top
R126  2.2k  [0603]  14.48,75.96 270 top
R127  2.2k  [0603]  16,75.95 270 top
R128  200k  [0603]  18.01,82.3 90 top
R129  2.2k  [0603]  16.51,82.3 90 top
R130  2.2k  [0603]  14.73,82.31 90 top
R131  2.2k  [0603]  34.04,75.96 270 top
R132  2.2k  [0603]  35.56,75.95 270 top
R133  200k  [0603]  37.57,82.3 90 top
R134  2.2k  [0603]  36.07,82.3 90 top
R135  2.2k  [0603]  34.29,82.31 90 top
R136  2.2k  [0603]  53.59,75.96 270 top
R137  2.2k  [0603]  55.12,75.95 270 top
R138  200k  [0603]  57.12,82.3 90 top
R139  2.2k  [0603]  55.63,82.3 90 top
R140  2.2k  [0603]  53.85,82.31 90 top
R141  2.2k  [0603]  73.15,75.96 270 top
R142  2.2k  [0603]  74.68,75.95 270 top
R143  200k  [0603]  76.68,82.3 90 top
R144  2.2k  [0603]  75.18,82.3 90 top
R145  2.2k  [0603]  73.41,82.31 90 top
R146  2.2k  [0603]  92.71,75.96 270 top
R147  2.2k  [0603]  94.23,75.95 270 top
R148  200k  [0603]  96.24,82.3 90 top
R149  2.2k  [0603]  94.74,82.3 90 top
R150  2.2k  [0603]  92.96,82.31 90 top
R151  2.2k  [0603]  14.48,89.17 270 top
R152  2.2k  [0603]  16,89.15 270 top
R153  200k  [0603]  18.01,95.5 90 top
R154  2.2k  [0603]  16.51,95.5 90 top
R155  2.2k  [0603]  14.73,95.52 90 top
R156  2.2k  [0603]  34.04,89.17 270 top
R157  2.2k  [0603]  35.56,89.15 270 top
R158  200k  [0603]  37.57,95.5 90 top
R159  2.2k  [0603]  36.07,95.5 90 top
R160  2.2k  [0603]  34.29,95.52 90 top
R161  2.2k  [0603]  53.59,89.17 270 top
R162  2.2k  [0603]  55.12,89.15 270 top
R163  200k  [0603]  57.12,95.5 90 top
R164  2.2k  [0603]  55.63,95.5 90 top
R165  2.2k  [0603]  53.85,95.52 90 top
R166  2.2k  [0603]  73.15,89.17 270 top
R167  2.2k  [0603]  74.68,89.15 270 top
R168  200k  [0603]  76.68,95.5 90 top
R169  2.2k  [0603]  75.18,95.5 90 top
R170  2.2k  [0603]  73.41,95.52 90 top
R171  2.2k  [0603]  92.71,89.17 270 top
R172  2.2k  [0603]  94.23,89.15 270 top
R173  200k  [0603]  96.24,95.5 90 top
R174  2.2k  [0603]  94.74,95.5 90 top
R175  2.2k  [0603]  92.96,95.52 90 top
R176  2.2k  [0603]  14.48,102.38 270 top
R177  2.2k  [0603]  16,102.36 270 top
R178  200k  [0603]  18.01,108.71 90 top
R179  2.2k  [0603]  16.51,108.71 90 top
R180  2.2k  [0603]  14.73,108.73 90 top
R181  2.2k  [0603]  34.04,102.38 270 top
R182  2.2k  [0603]  35.56,102.36 270 top
R183  200k  [0603]  37.57,108.71 90 top
R184  2.2k  [0603]  36.07,108.71 90 top
R185  2.2k  [0603]  34.29,108.73 90 top
R186  2.2k  [0603]  53.59,102.38 270 top
R187  2.2k  [0603]  55.12,102.36 270 top
R188  200k  [0603]  57.12,108.71 90 top
R189  2.2k  [0603]  55.63,108.71 90 top
R190  2.2k  [0603]  53.85,108.73 90 top
R191  2.2k  [0603]  73.15,102.38 270 top
R192  2.2k  [0603]  74.68,102.36 270 top
R193  200k  [0603]  76.68,108.71 90 top
R194  2.2k  [0603]  75.18,108.71 90 top
R195  2.2k  [0603]  73.41,108.73 90 top
R196  2.2k  [0603]  92.71,102.38 270 top
R197  2.2k  [0603]  94.23,102.36 270 top
R198  200k  [0603]  96.24,108.71 90 top
R199  2.2k  [0603]  94.74,108.71 90 top
R200  2.2k  [0603]  92.96,108.73 90 top
R201  2.2k  [0603]  14.48,115.59 270 top
R202  2.2k  [0603]  16,115.57 270 top
R203  200k  [0603]  18.01,121.92 90 top
R204  2.2k  [0603]  16.51,121.92 90 top
R205  2.2k  [0603]  14.73,121.94 90 top
R206  2.2k  [0603]  34.04,115.59 270 top
R207  2.2k  [0603]  35.56,115.57 270 top
R208  200k  [0603]  37.57,121.92 90 top
R209  2.2k  [0603]  36.07,121.92 90 top
R210  2.2k  [0603]  34.29,121.94 90 top
R211  2.2k  [0603]  53.59,115.59 270 top
R212  2.2k  [0603]  55.12,115.57 270 top
R213  200k  [0603]  57.12,121.92 90 top
R214  2.2k  [0603]  55.63,121.92 90 top
R215  2.2k  [0603]  53.85,121.94 90 top
R216  2.2k  [0603]  73.15,115.59 270 top
R217  2.2k  [0603]  74.68,115.57 270 top
R218  200k  [0603]  76.68,121.92 90 top
R219  2.2k  [0603]  75.18,121.92 90 top
R220  2.2k  [0603]  73.41,121.94 90 top
R221  2.2k  [0603]  92.71,115.59 270 top
R222  2.2k  [0603]  94.23,115.57 270 top
R223  200k  [0603]  96.24,121.92 90 top
R224  2.2k  [0603]  94.74,121.92 90 top
R225  2.2k  [0603]  92.96,121.94 90 top
R226  2.2k  [0603]  14.48,128.79 270 top
R227  2.2k  [0603]  16,128.78 270 top
R228  200k  [0603]  18.01,135.13 90 top
R229  2.2k  [0603]  16.51,135.13 90 top
R230  2.2k  [0603]  14.73,135.14 90 top
R231  2.2k  [0603]  34.04,128.79 270 top
R232  2.2k  [0603]  35.56,128.78 270 top
R233  200k  [0603]  37.57,135.13 90 top
R234  2.2k  [0603]  36.07,135.13 90 top
R235  2.2k  [0603]  34.29,135.14 90 top
R236  2.2k  [0603]  53.59,128.79 270 top
R237  2.2k  [0603]  55.12,128.78 270 top
R238  200k  [0603]  57.12,135.13 90 top
R239  2.2k  [0603]  55.63,135.13 90 top
R240  2.2k  [0603]  53.85,135.14 90 top
R241  2.2k  [0603]  73.15,128.79 270 top
R242  2.2k  [0603]  74.68,128.78 270 top
R243  200k  [0603]  76.68,135.13 90 top
R244  2.2k  [0603]  75.18,135.13 90 top
R245  2.2k  [0603]  73.41,135.14 90 top
R246  2.2k  [0603]  92.71,128.79 270 top
R247  2.2k  [0603]  94.23,128.78 270 top
R248  200k  [0603]  96.24,135.13 90 top
R249  2.2k  [0603]  94.74,135.13 90 top
R250  2.2k  [0603]  92.96,135.14 90 top
U1  PCA9306  [VSSOP_8PIN]  17.02,13.21 0 top
U2  PCA9306  [VSSOP_8PIN]  36.58,13.21 0 top
U3  PCA9306  [VSSOP_8PIN]  56.13,13.21 0 top
U4  PCA9306  [VSSOP_8PIN]  75.69,13.21 0 top
U5  PCA9306  [VSSOP_8PIN]  95.25,13.21 0 top
U6  PCA9306  [VSSOP_8PIN]  17.02,26.42 0 top
U7  PCA9306  [VSSOP_8PIN]  36.58,26.42 0 top
U8  PCA9306  [VSSOP_8PIN]  56.13,26.42 0 top
U9  PCA9306  [VSSOP_8PIN]  75.69,26.42 0 top
U10  PCA9306  [VSSOP_8PIN]  95.25,26.42 0 top
U11  PCA9306  [VSSOP_8PIN]  17.02,39.62 0 top
U12  PCA9306  [VSSOP_8PIN]  36.58,39.62 0 top
U13  PCA9306  [VSSOP_8PIN]  56.13,39.62 0 top
U14  PCA9306  [VSSOP_8PIN]  75.69,39.62 0 top
U15  PCA9306  [VSSOP_8PIN]  95.25,39.62 0 top
U16  PCA9306  [VSSOP_8PIN]  17.02,52.83 0 top
U17  PCA9306  [VSSOP_8PIN]  36.58,52.83 0 top
U18  PCA9306  [VSSOP_8PIN]  56.13,52.83 0 top
U19  PCA9306  [VSSOP_8PIN]  75.69,52.83 0 top
U20  PCA9306  [VSSOP_8PIN]  95.25,52.83 0 top
U21  PCA9306  [VSSOP_8PIN]  17.02,66.04 0 top
U22  PCA9306  [VSSOP_8PIN]  36.58,66.04 0 top
U23  PCA9306  [VSSOP_8PIN]  56.13,66.04 0 top
U24  PCA9306  [VSSOP_8PIN]  75.69,66.04 0 top
U25  PCA9306  [VSSOP_8PIN]  95.25,66.04 0 top
U26  PCA9306  [VSSOP_8PIN]  17.02,79.25 0 top
U27  PCA9306  [VSSOP_8PIN]  36.58,79.25 0 top
U28  PCA9306  [VSSOP_8PIN]  56.13,79.25 0 top
U29  PCA9306  [VSSOP_8PIN]  75.69,79.25 0 top
U30  PCA9306  [VSSOP_8PIN]  95.25,79.25 0 top
U31  PCA9306  [VSSOP_8PIN]  17.02,92.46 0 top
U32  PCA9306  [VSSOP_8PIN]  36.58,92.46 0 top
U33  PCA9306  [VSSOP_8PIN]  56.13,92.46 0 top
U34  PCA9306  [VSSOP_8PIN]  75.69,92.46 0 top
U35  PCA9306  [VSSOP_8PIN]  95.25,92.46 0 top
U36  PCA9306  [VSSOP_8PIN]  17.02,105.66 0 top
U37  PCA9306  [VSSOP_8PIN]  36.58,105.66 0 top
U38  PCA9306  [VSSOP_8PIN]  56.13,105.66 0 top
U39  PCA9306  [VSSOP_8PIN]  75.69,105.66 0 top
U40  PCA9306  [VSSOP_8PIN]  95.25,105.66 0 top
U41  PCA9306  [VSSOP_8PIN]  17.02,118.87 0 top
U42  PCA9306  [VSSOP_8PIN]  36.58,118.87 0 top
U43  PCA9306  [VSSOP_8PIN]  56.13,118.87 0 top
U44  PCA9306  [VSSOP_8PIN]  75.69,118.87 0 top
U45  PCA9306  [VSSOP_8PIN]  95.25,118.87 0 top
U46  PCA9306  [VSSOP_8PIN]  17.02,132.08 0 top
U47  PCA9306  [VSSOP_8PIN]  36.58,132.08 0 top
U48  PCA9306  [VSSOP_8PIN]  56.13,132.08 0 top
U49  PCA9306  [VSSOP_8PIN]  75.69,132.08 0 top
U50  PCA9306  [VSSOP_8PIN]  95.25,132.08 0 top
U$1  [SWITCH1]  19.76,13.46 90 bottom
U$2  [VREF13]  8.56,10.64 0 top
U$3  [SCL11]  8.48,15.7 0 top
U$4  [SDA10]  8.56,13.21 0 top
U$5  [GND2]  8.61,8.13 0 top
U$6  [VREF20]  19.3,10.67 0 top
U$7  [SCL20]  20.22,15.7 0 top
U$8  [SDA21]  20.07,13.21 0 top
U$9  [EN0]  21.46,18.29 0 top
U$10  [EN1]  18.67,18.54 0 bottom
U$11  [GND2]  20.57,8.13 0 top
U$12  [LOGIC_LEVEL0]  20.78,11.2 0 bottom
U$13  [TRANSLATOR1]  20.62,9.75 0 bottom
U$14  [PCA93062]  20.02,8.38 0 bottom
U$15  [ON2]  14.76,15.04 90 bottom
U$16  [VREF13]  28.12,10.64 0 top
U$17  [HIGH0]  22.61,15.14 90 bottom
U$18  [LOW1]  10.19,15.01 90 bottom
U$19  [HIGH0]  18.8,10.92 270 top
U$20  [LOW1]  12.95,19.56 270 top
U$21  [1#2V#3#3V0]  10.19,6.73 90 bottom
U$22  [1#8V#5V1]  22.61,6.76 90 bottom
U$23  [SCL11]  28.04,15.7 0 top
U$24  [SDA10]  28.12,13.21 0 top
U$25  [GND2]  28.17,8.13 0 top
U$26  [VREF20]  38.86,10.67 0 top
U$27  [SDA21]  39.62,13.21 0 top
U$28  [EN0]  41.02,18.29 0 top
U$29  [EN1]  38.23,18.54 0 bottom
U$30  [LOGIC_LEVEL0]  40.34,11.2 0 bottom
U$31  [TRANSLATOR1]  40.18,9.75 0 bottom
U$32  [PCA93062]  39.57,8.38 0 bottom
U$33  [GND2]  40.13,8.13 0 top
U$34  [SCL20]  39.78,15.7 0 top
U$35  [HIGH0]  42.16,15.14 90 bottom
U$36  [LOW1]  29.74,15.01 90 bottom
U$37  [HIGH0]  38.35,10.92 270 top
U$38  [LOW1]  32.51,19.56 270 top
U$39  [ON2]  34.32,15.04 90 bottom
U$40  [1#2V#3#3V0]  29.74,6.73 90 bottom
U$41  [1#8V#5V1]  42.16,6.76 90 bottom
U$42  [SWITCH1]  39.32,13.46 90 bottom
U$43  [VREF13]  47.68,10.64 0 top
U$44  [SCL11]  47.6,15.7 0 top
U$45  [SDA10]  47.68,13.21 0 top
U$46  [GND2]  47.73,8.13 0 top
U$47  [VREF20]  58.42,10.67 0 top
U$48  [SDA21]  59.18,13.21 0 top
U$49  [EN0]  60.58,18.29 0 top
U$50  [EN1]  57.78,18.54 0 bottom
U$51  [LOGIC_LEVEL0]  59.89,11.2 0 bottom
U$52  [TRANSLATOR1]  59.74,9.75 0 bottom
U$53  [PCA93062]  59.13,8.38 0 bottom
U$54  [GND2]  59.69,8.13 0 top
U$55  [SCL20]  59.33,15.7 0 top
U$56  [HIGH0]  61.72,15.14 90 bottom
U$57  [LOW1]  49.3,15.01 90 bottom
U$58  [HIGH0]  57.91,10.92 270 top
U$59  [LOW1]  52.07,19.56 270 top
U$60  [ON2]  53.87,15.04 90 bottom
U$61  [1#2V#3#3V0]  49.3,6.73 90 bottom
U$62  [1#8V#5V1]  61.72,6.76 90 bottom
U$63  [SWITCH1]  58.88,13.46 90 bottom
U$64  [VREF13]  67.23,10.64 0 top
U$65  [SCL11]  67.16,15.7 0 top
U$66  [SDA10]  67.23,13.21 0 top
U$67  [GND2]  67.28,8.13 0 top
U$68  [VREF20]  77.98,10.67 0 top
U$69  [SDA21]  78.74,13.21 0 top
U$70  [EN0]  80.14,18.29 0 top
U$71  [EN1]  77.34,18.54 0 bottom
U$72  [LOGIC_LEVEL0]  79.45,11.2 0 bottom
U$73  [TRANSLATOR1]  79.3,9.75 0 bottom
U$74  [PCA93062]  78.69,8.38 0 bottom
U$75  [GND2]  79.25,8.13 0 top
U$76  [SCL20]  78.89,15.7 0 top
U$77  [HIGH0]  81.28,15.14 90 bottom
U$78  [LOW1]  68.86,15.01 90 bottom
U$79  [HIGH0]  77.47,10.92 270 top
U$80  [LOW1]  71.63,19.56 270 top
U$81  [ON2]  73.43,15.04 90 bottom
U$82  [1#2V#3#3V0]  68.86,6.73 90 bottom
U$83  [1#8V#5V1]  81.28,6.76 90 bottom
U$84  [SWITCH1]  78.44,13.46 90 bottom
U$85  [VREF13]  86.79,10.64 0 top
U$86  [SCL11]  86.72,15.7 0 top
U$87  [SDA10]  86.79,13.21 0 top
U$88  [GND2]  86.84,8.13 0 top
U$89  [VREF20]  97.54,10.67 0 top
U$90  [SDA21]  98.3,13.21 0 top
U$91  [EN0]  99.7,18.29 0 top
U$92  [EN1]  96.9,18.54 0 bottom
U$93  [LOGIC_LEVEL0]  99.01,11.2 0 bottom
U$94  [TRANSLATOR1]  98.86,9.75 0 bottom
U$95  [PCA93062]  98.25,8.38 0 bottom
U$96  [GND2]  98.81,8.13 0 top
U$97  [SCL20]  98.45,15.7 0 top
U$98  [HIGH0]  100.84,15.14 90 bottom
U$99  [LOW1]  88.42,15.01 90 bottom
U$100  [HIGH0]  97.03,10.92 270 top
U$101  [LOW1]  91.19,19.56 270 top
U$102  [ON2]  92.99,15.04 90 bottom
U$103  [1#2V#3#3V0]  88.42,6.73 90 bottom
U$104  [1#8V#5V1]  100.84,6.76 90 bottom
U$105  [SWITCH1]  97.99,13.46 90 bottom
U$106  [VREF13]  8.56,23.85 0 top
U$107  [SCL11]  8.48,28.91 0 top
U$108  [SDA10]  8.56,26.42 0 top
U$109  [GND2]  8.61,21.34 0 top
U$110  [VREF20]  19.3,23.88 0 top
U$111  [SDA21]  20.07,26.42 0 top
U$112  [EN0]  21.46,31.5 0 top
U$113  [EN1]  18.67,31.75 0 bottom
U$114  [LOGIC_LEVEL0]  20.78,24.41 0 bottom
U$115  [TRANSLATOR1]  20.62,22.96 0 bottom
U$116  [PCA93062]  20.02,21.59 0 bottom
U$117  [GND2]  20.57,21.34 0 top
U$118  [SCL20]  20.22,28.91 0 top
U$119  [HIGH0]  22.61,28.35 90 bottom
U$120  [LOW1]  10.19,28.22 90 bottom